# EAGLE board STRAIGT_SENSOR_MUX_16 (EAGLE 6.4)

Size 160 x 100 mm. Coordinates in mm from the lower left corner, seen from the top.
Outline: 0,0 160,0 160,100 0,100 0,0
Copper layers (1*16): Top 0.035mm / dielectric 1.5mm / Bottom 0.035mm
Design rules "default": minimum track width 10mil, minimum drill 24mil, track to track 8mil, track to pad 8mil, pad to pad 8mil, via to via 8mil, smd to smd 8mil, copper to edge 40mil, drill to drill 8mil, minimum pad ring 10mil, minimum via ring 8mil, stop-mask expansion 4mil, vias tented up to drill 0mil, thermal gap 10mil

## Footprints (pad centres in the part's own frame; a part is rotated, then mirrored left to right if it is on the bottom)
BPX65 = drill 0.813 octagon: A -0.889,-0.889; K 0.889,0.889
0207/10 = drill 0.813 octagon: 1 -5.08,0; 2 5.08,0
SSOP24 = smd 0.348 x 1.397: 1 -3.575,-3.656; 2 -2.925,-3.656; 3 -2.275,-3.656; 4 -1.625,-3.656; 5 -0.975,-3.656; 6 -0.325,-3.656; 7 0.325,-3.656; 8 0.975,-3.656; 9 1.625,-3.656; 10 2.275,-3.656; 11 2.925,-3.656; 12 3.575,-3.656; 13 3.575,3.656; 14 2.925,3.656; 15 2.275,3.656; 16 1.625,3.656; 17 0.975,3.656; 18 0.325,3.656; 19 -0.325,3.656; 20 -0.975,3.656; 21 -1.625,3.656; 22 -2.275,3.656; 23 -2.925,3.656; 24 -3.575,3.656

## Placement (x,y rotation side)
D1  Photo0  [BPX65]  -31.75,3.81 0 top  (outside the outline)
D2  Photo1  [BPX65]  -45.72,3.81 0 top  (outside the outline)
D3  Photo2  [BPX65]  -59.69,3.81 0 top  (outside the outline)
D4  Photo3  [BPX65]  -22.86,12.7 0 top  (outside the outline)
D5  Photo4  [BPX65]  -36.83,12.7 0 top  (outside the outline)
D6  Photo5  [BPX65]  -50.8,12.7 0 top  (outside the outline)
D7  Photo6  [BPX65]  -22.86,19.05 0 top  (outside the outline)
D8  Photo7  [BPX65]  -36.83,19.05 0 top  (outside the outline)
D9  Photo0  [BPX65]  -50.8,19.05 0 top  (outside the outline)
D10  Photo0  [BPX65]  -22.86,25.4 0 top  (outside the outline)
D11  Photo0  [BPX65]  -36.83,25.4 0 top  (outside the outline)
D12  Photo0  [BPX65]  -50.8,25.4 0 top  (outside the outline)
D13  Photo0  [BPX65]  -22.86,31.75 0 top  (outside the outline)
D14  Photo0  [BPX65]  -36.83,31.75 0 top  (outside the outline)
D15  Photo0  [BPX65]  -50.8,31.75 0 top  (outside the outline)
D16  Photo0  [BPX65]  -22.86,38.1 0 top  (outside the outline)
R1  10k  [0207/10]  -33.02,36.83 0 top  (outside the outline)
R2  10k  [0207/10]  -45.72,36.83 0 top  (outside the outline)
R3  10k  [0207/10]  -19.05,43.18 0 top  (outside the outline)
R4  10k  [0207/10]  -31.75,43.18 0 top  (outside the outline)
R5  10k  [0207/10]  -44.45,43.18 0 top  (outside the outline)
R6  10k  [0207/10]  -57.15,43.18 0 top  (outside the outline)
R7  10k  [0207/10]  -19.05,48.26 0 top  (outside the outline)
R8  10k  [0207/10]  -31.75,48.26 0 top  (outside the outline)
R9  10k  [0207/10]  -44.45,48.26 0 top  (outside the outline)
R10  10k  [0207/10]  -57.15,48.26 0 top  (outside the outline)
R11  10k  [0207/10]  -19.05,53.34 0 top  (outside the outline)
R12  10k  [0207/10]  -31.75,53.34 0 top  (outside the outline)
R13  10k  [0207/10]  -44.45,53.34 0 top  (outside the outline)
R14  10k  [0207/10]  -57.15,53.34 0 top  (outside the outline)
R15  10k  [0207/10]  -19.05,58.42 0 top  (outside the outline)
R16  10k  [0207/10]  -31.75,58.42 0 top  (outside the outline)
U$1  MUX-74HC4067SMD  [SSOP24]  -17.78,5.08 0 top  (outside the outline)

## Library data of the parts
D1-D16 = opto-trans-siemens; MPN: BPX65.; OC_FARNELL: 327451; OC_NEWARK: 06WX2764
R1-R16 = resistor
U$1 = SparkFun-AnalogIC

## Nets
+3V3: D1.A D2.A D3.A D4.A D5.A D6.A D7.A D8.A D9.A D10.A D11.A D12.A D13.A D14.A D15.A D16.A U$1.24
D1: U$1.10
D2: U$1.11
D3: U$1.14
D4: U$1.13
GND: R1.2 R2.2 R3.2 R4.2 R5.2 R6.2 R7.2 R8.2 R9.2 R10.2 R11.2 R12.2 R13.2 R14.2 R15.2 R16.2 U$1.12 U$1.15
MUX1: U$1.1
PHOTO1: D8.K R8.1 U$1.9
PHOTO2: D7.K R7.1 U$1.8
PHOTO3: D6.K R6.1 U$1.7
PHOTO4: D5.K R5.1 U$1.6
PHOTO5: D4.K R4.1 U$1.5
PHOTO6: D3.K R3.1 U$1.4
PHOTO7: D2.K R2.1 U$1.3
PHOTO8: D1.K R1.1 U$1.2
PHOTO9: D9.K R9.1 U$1.23
PHOTO10: D10.K R10.1 U$1.22
PHOTO11: D11.K R11.1 U$1.21
PHOTO12: D12.K R12.1 U$1.20
PHOTO13: D13.K R13.1 U$1.19
PHOTO14: D14.K R14.1 U$1.18
PHOTO15: D15.K R15.1 U$1.17
PHOTO16: D16.K R16.1 U$1.16

## Tracks (layer width: path | path; a pad name or v marks a point on that pad's centre or on a via)
+3V3  (16 unrouted)
GND  (17 unrouted)
PHOTO1  (2 unrouted)
PHOTO2  (2 unrouted)
PHOTO3  (2 unrouted)
PHOTO4  (2 unrouted)
PHOTO5  (2 unrouted)
PHOTO6  (2 unrouted)
PHOTO7  (2 unrouted)
PHOTO8  (2 unrouted)
PHOTO9  (2 unrouted)
PHOTO10  (2 unrouted)
PHOTO11  (2 unrouted)
PHOTO12  (2 unrouted)
PHOTO13  (2 unrouted)
PHOTO14  (2 unrouted)
PHOTO15  (2 unrouted)
PHOTO16  (2 unrouted)